# Altium PCB PCB1.pcbdoc
Units mm, origin at the board's own origin, x right, y up, seen from the top; angles counter-clockwise.
Board outline 213.29 x 130.36 mm, 2 copper layers (Top Layer, Bottom Layer), stack 1.58 mm thick; 81 components, 104 nets, 410 pads, 0 vias.
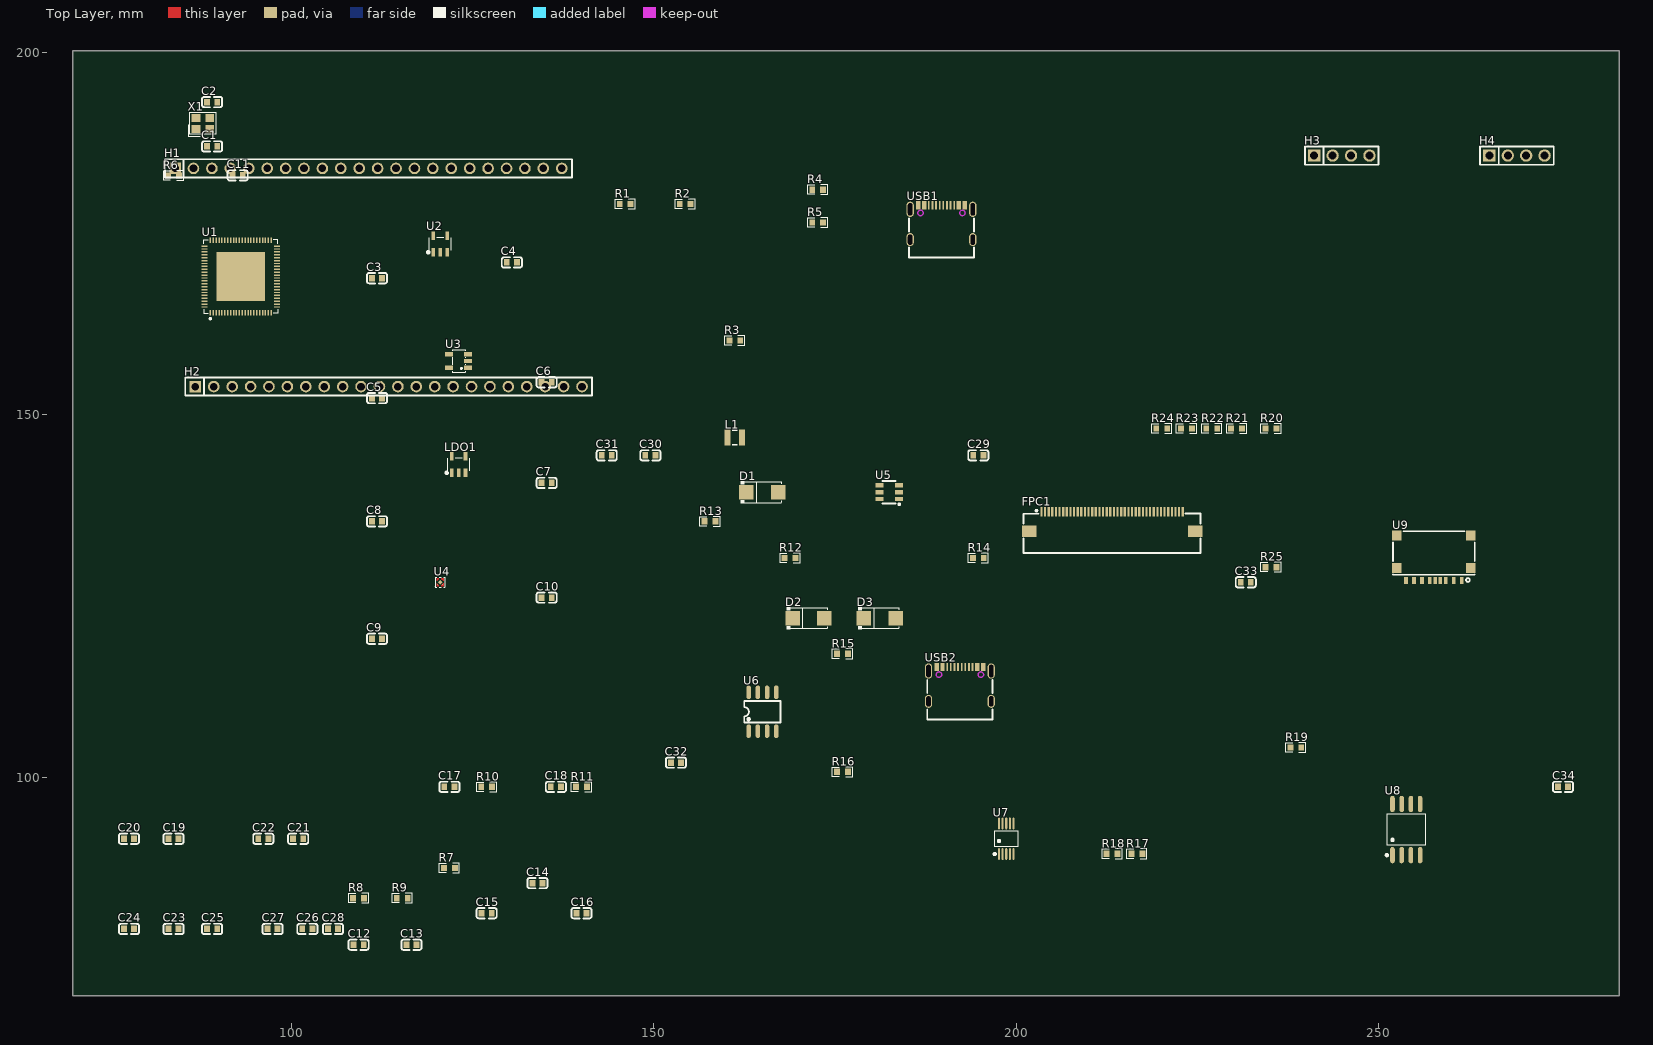
[diagram p0: Top Layer view]
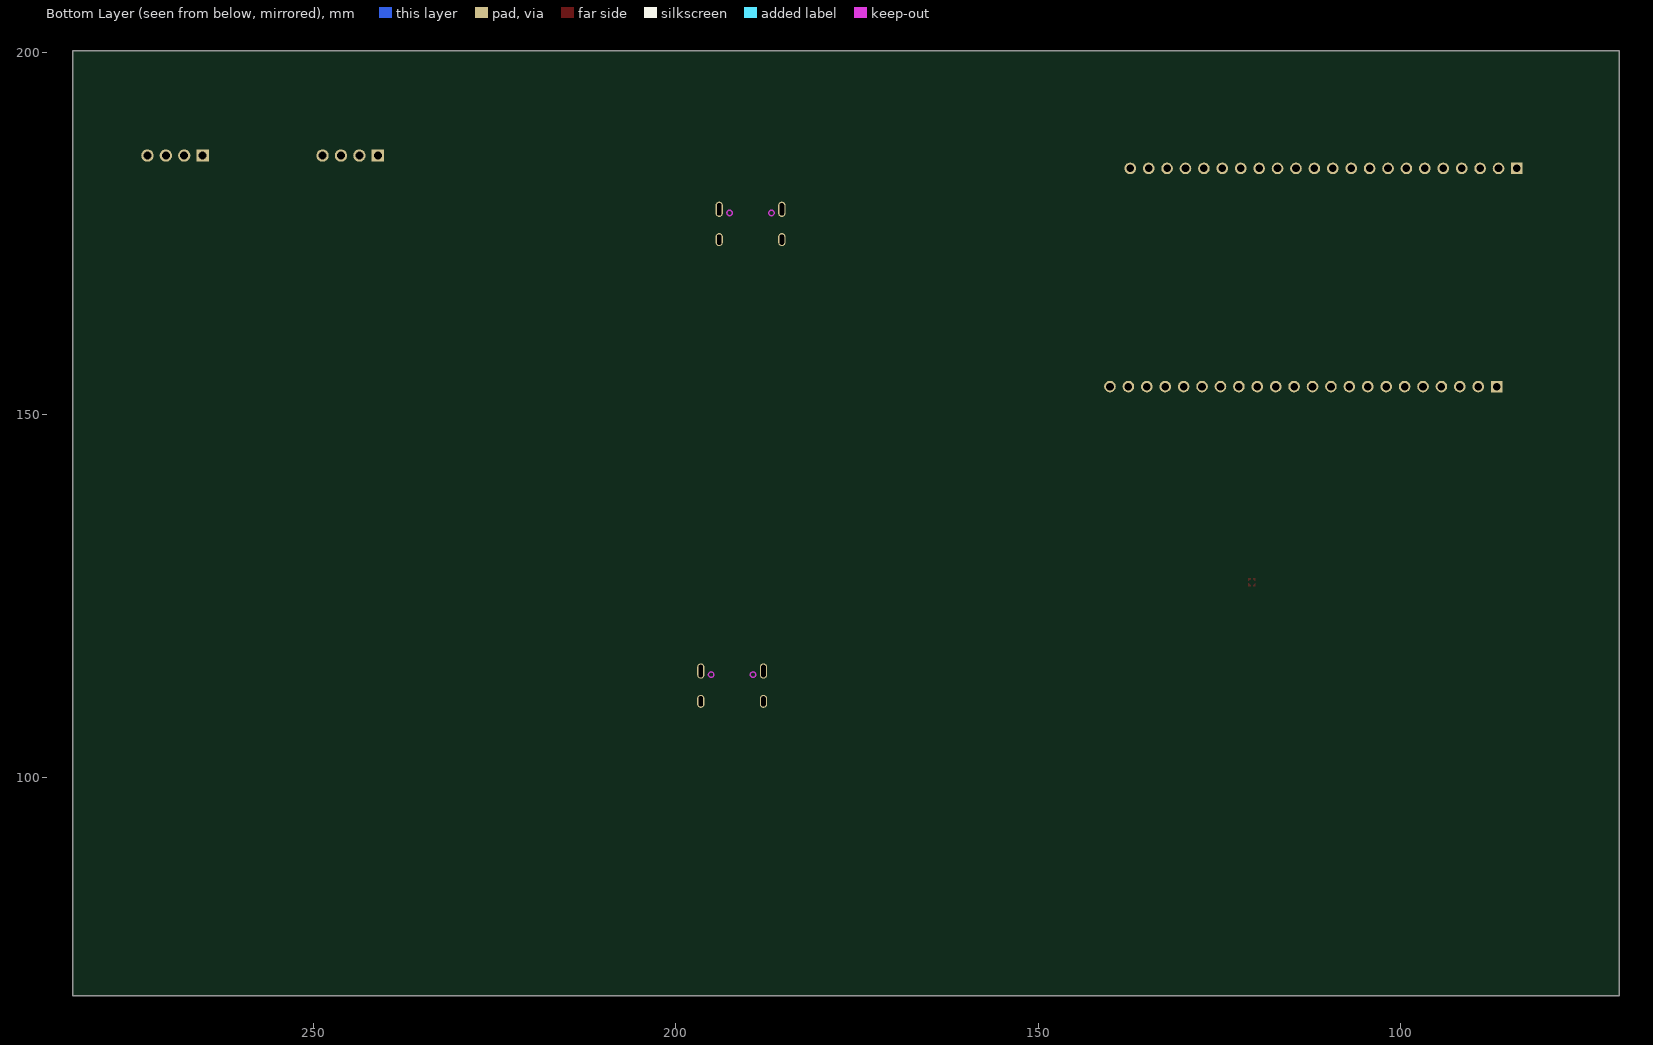
[diagram p1: Bottom Layer view, seen from below]

## Layer stack, top to bottom
Top Solder Mask Layer: solder mask 0.01, Dk 3.3
Top Layer: signal copper 0.035
Dielectric1: surface 1.51, FR4, Dk 4.5
Bottom Layer: signal copper 0.035
Bottom Solder Mask Layer: solder mask 0.01, Dk 3.3

## Board outline
283.139,69.85 69.85,69.85 69.85,200.206 283.139,200.206

## Design rules (kind name [scope] priority, off if disabled: settings)
BoardOutlineClearance copperThickness1oz [All] p0: genericclearance=0.254 ignorepadtopadclearanceinfootprint=FALSE except(0: Arc-SplitContinuation Track-SplitContinuation SMDPad-SplitContinuation THPad-SplitContinuation Via-SplitContinuation Fill-SplitContinuation Poly-SplitContinuation Region-SplitContinuation Text-SplitContinuation)
BoardOutlineClearance copperThickness2oz [All] p0: genericclearance=0.254 ignorepadtopadclearanceinfootprint=FALSE except(0: Arc-SplitContinuation Track-SplitContinuation SMDPad-SplitContinuation THPad-SplitContinuation Via-SplitContinuation Fill-SplitContinuation Poly-SplitContinuation Region-SplitContinuation Text-SplitContinuation)
BoardOutlineClearance otherClearance [All] p0: genericclearance=0.254 ignorepadtopadclearanceinfootprint=FALSE except(0: Arc-SplitContinuation Track-SplitContinuation SMDPad-SplitContinuation THPad-SplitContinuation Via-SplitContinuation Fill-SplitContinuation Poly-SplitContinuation Region-SplitContinuation Text-SplitContinuation)
Clearance copperThickness1oz [All] p1: gap=0.178 ignorepadtopadclearanceinfootprint=FALSE
Clearance copperThickness2oz [All] p1: gap=0.178 ignorepadtopadclearanceinfootprint=FALSE
Clearance otherClearance [All] p1: gap=0.178 ignorepadtopadclearanceinfootprint=FALSE
DiffPairsRouting differentialPair [All] p1: maxuncoupledlength=10 minlimit=6 maxlimit=Infinity mostfreqgap=6 toplayer_minwidth=5 toplayer_prefwidth=10 toplayer_maxwidth=100 bottomlayer_minwidth=5 bottomlayer_prefwidth=10 bottomlayer_maxwidth=100
PasteMaskExpansion pasteMaskExpansion [All] p1: expansion=0
PlaneConnect innerPlane [All] p1: planeconnectstyle=Relief reliefexpansion=0.508 reliefentries=4 reliefconductorwidth=0.254 reliefairgap=0.254
PolygonConnect copperRegion [All] p1: connectstyle=Relief reliefentries=4 reliefconductorwidth=10 polygonreliefangle="90 Angle" airgapwidth=10
RoutingVias viaSize [All] p1: viastyle="Through Hole" holewidth=12.0078 minholewidth=11.811 maxholewidth=248.0314 width=12.0078 minwidth=11.811 maxwidth=248.0314
SolderMaskExpansion solderMaskExpansion [All] p1: useseparateexpansions=TRUE expansion=2 expansionbottom=2
Width copperThickness1oz [All] p1: maxlimit=100 minlimit=5 preferedwidth=10
Width copperThickness2oz [All] p1: maxlimit=100 minlimit=8 preferedwidth=10

## Components (designator, comment, footprint, x,y, rotation, side; value= is the part's Value field where it differs from the comment)
C1 "" C0603 89.054,187.033 r0 top
C2 "" C0603 89.054,193.146 r0 top
C3 "" C0603 111.803,168.849 r0 top
C4 "" C0603 130.405,171.024 r0 top
C5 "" C0603 111.803,152.32 r0 top
C6 "" C0603 135.209,154.494 r0 top
C7 "" C0603 135.209,140.603 r0 top
C8 "" C0603 111.803,135.309 r0 top
C9 "" C0603 111.803,119.115 r0 top
C10 "" C0603 135.209,124.799 r0 top
C11 "" C0603 92.587,183.029 r0 top
C12 "" C0603 109.263,76.91 r0 top
C13 "" C0603 116.551,76.91 r0 top
C14 "" C0603 133.939,85.406 r0 top
C15 "" C0603 126.927,81.258 r0 top
C16 "" C0603 140.013,81.258 r0 top
C17 "" C0603 121.79,98.689 r0 top
C18 "" C0603 136.479,98.689 r0 top
C19 "" C0603 83.739,91.527 r0 top
C20 "" C0603 77.59,91.527 r0 top
C21 "" C0603 100.925,91.527 r0 top
C22 "" C0603 96.121,91.527 r0 top
C23 "" C0603 83.739,79.084 r0 top
C24 "" C0603 77.59,79.084 r0 top
C25 "" C0603 89.054,79.084 r0 top
C26 "" C0603 102.195,79.084 r0 top
C27 "" C0603 97.391,79.084 r0 top
C28 "" C0603 105.729,79.084 r0 top
C29 "" C0603 194.744,144.413 r0 top
C30 "" C0603 149.509,144.413 r0 top
C31 "" C0603 143.491,144.413 r0 top
C32 "" C0603 153.043,102.033 r0 top
C33 "" C0603 231.639,126.911 r0 top
C34 "" C0603 275.399,98.689 r0 top
D1 "" SMA_L4.3-W2.6-LS5.2-RD 164.968,139.333 r0 top
D2 "" SMA_L4.3-W2.6-LS5.2-RD 171.318,121.957 r0 top
D3 "" SMA_L4.3-W2.6-LS5.2-RD 181.172,121.957 r0 top
FPC1 "" FPC-SMD_AFC01-S40FCA-00 213.2,135.309 r0 top
H1 "" HDR-TH_22P-P2.54-V-M 110.617,183.997 r0 top
H2 "" HDR-TH_22P-P2.54-V-M 113.411,153.898 r0 top
H3 "" HDR-TH_4P-P2.54-V-M 244.89,185.763 r0 top
H4 "" HDR-TH_4P-P2.54-V-M 269.049,185.763 r0 top
L1 "" IND-SMD_L2.5-W2.0_MHCHL2520 161.158,146.85 r0 top
LDO1 "" SOT-23-5_L3.0-W1.7-P0.95-LS2.8-BL 123.06,143.143 r0 top
R1 "" R0603 146.031,179.082 r0 top
R2 "" R0603 154.313,179.082 r0 top
R3 "" R0603 161.158,160.268 r0 top
R4 "" R0603 172.588,181.055 r0 top
R5 "" R0603 172.588,176.542 r0 top
R6 "" R0603 83.739,183.029 r0 top
R7 "" R0603 121.79,87.48 r0 top
R8 "" R0603 109.263,83.332 r0 top
R9 "" R0603 115.281,83.332 r0 top
R10 "" R0603 126.927,98.689 r0 top
R11 "" R0603 140.013,98.689 r0 top
R12 "" R0603 168.778,130.255 r0 top
R13 "" R0603 157.736,135.309 r0 top
R14 "" R0603 194.744,130.255 r0 top
R15 "" R0603 176.011,117.041 r0 top
R16 "" R0603 176.011,100.763 r0 top
R17 "" R0603 216.623,89.454 r0 top
R18 "" R0603 213.2,89.454 r0 top
R19 "" R0603 238.54,104.107 r0 top
R20 "" R0603 235.117,148.12 r0 top
R21 "" R0603 230.369,148.12 r0 top
R22 "" R0603 226.946,148.12 r0 top
R23 "" R0603 223.468,148.12 r0 top
R24 "" R0603 220.046,148.12 r0 top
R25 "" R0603 235.117,128.985 r0 top
U1 "" QFN-88_L10.0-W10.0-P0.40-BL-EP6.75 93.01,169.075 r0 top
U2 "" SOT-23-5_L3.0-W1.7-P0.95-LS2.8-BL 120.52,173.564 r0 top
U3 "" SOT-23-5_L3.0-W1.7-P0.95-LS2.8-BR 123.06,157.431 r0 top
U4 "" FBP4L_L1.0-W1.0-P0.65-BL-EP 120.52,126.911 r0 top
U5 "" SOT-23-6_L2.9-W1.6-P0.95-LS2.8-BR 182.442,139.333 r0 top
U6 "" SOP-8_L4.9-W3.9-P1.27-LS6.0-BL 164.968,109.044 r0 top
U7 "" MSOP-10_L3.0-W3.0-P0.50-LS5.0-BL 198.598,91.527 r0 top
U8 "" SOIC-8_L5.3-W5.3-P1.27-LS8.0-BL 253.78,92.797 r0 top
U9 "" TF-SMD_TF-123-ARP9H15 257.59,130.255 r0 top
USB1 "" USB-C-SMD_MC-107DMS 189.664,176.542 r0 top
USB2 "" USB-C-SMD_MC-107DMS 192.204,112.854 r0 top
X1 "" CRYSTAL-SMD_4P-L2.5-W2.0-BL 87.784,190.204 r0 top

## Footprints (in the part's own frame and the unit in brackets; to place one, negate y for a bottom-side part, rotate by r counter-clockwise, add the part's x,y. Pads: shape width x height; smd on the part's side, far side on the other; paste and mask are expansions set on the pad)
C0603 [mm]
  rect 0.8x0.9 smd: 1(-0.7,0) 2(0.7,0)
  silkscreen extent -1.39,-0.71 1.39,0.71
CRYSTAL-SMD_4P-L2.5-W2.0-BL [mm]
  rect 1.2x1.1 smd: 1(-0.95,-0.75) 2(0.95,-0.75) 3(0.95,0.75) 4(-0.95,0.75)
  silkscreen extent -2.01,-1.76 1.78,1.53
FBP4L_L1.0-W1.0-P0.65-BL-EP [mm]
  round 0.06 smd: 1(-0.325,-0.325) 2(0.325,-0.325) 3(0.325,0.325) 4(-0.325,0.325)
  rect 0.48x0.48 smd rot 45: 5(0,0)
  Top Layer region: -0.175,-0.525 -0.475,-0.525 -0.475,-0.125 -0.175,-0.425
  Top Layer region: 0.175,0.525 0.475,0.525 0.475,0.175 0.425,0.175 0.175,0.425
  Top Layer region: -0.475,0.175 -0.475,0.525 -0.175,0.525 -0.175,0.475 -0.175,0.425 -0.425,0.175
  Top Layer region: 0.475,-0.175 0.475,-0.525 0.175,-0.525 0.175,-0.425 0.425,-0.175
  silkscreen extent -0.83,-0.7 0.66,0.7
FPC-SMD_AFC01-S40FCA-00 [mm]
  rect 0.3x1.3 smd: 1(-9.75,1.34) 2(-9.25,1.338) 3(-8.75,1.34) 4(-8.25,1.34) 5(-7.75,1.34) 6(-7.25,1.34) 7(-6.75,1.34) 8(-6.25,1.34) 9(-5.75,1.34) 10(-5.25,1.34) 11(-4.75,1.34) 12(-4.25,1.34) 13(-3.75,1.34) 14(-3.25,1.34) 15(-2.75,1.34) 16(-2.25,1.34) 17(-1.75,1.34) 18(-1.25,1.34) 19(-0.75,1.34) 20(-0.25,1.34) 21(0.25,1.34) 22(0.75,1.34) 23(1.25,1.34) 24(1.75,1.34) 25(2.25,1.34) 26(2.75,1.34) 27(3.25,1.34) 28(3.75,1.34) 29(4.25,1.34) 30(4.75,1.34) 31(5.25,1.34) 32(5.75,1.34) 33(6.25,1.34) 34(6.75,1.34) 35(7.25,1.34) 36(7.75,1.34) 37(8.25,1.34) 38(8.75,1.34) 39(9.25,1.34) 40(9.75,1.34)
  rect 2x1.6 smd: 41(-11.45,-1.34) 42(11.45,-1.34)
  silkscreen extent -12.21,-4.36 12.21,1.61
HDR-TH_4P-P2.54-V-M [mm]
  rect 1.7x1.7 hole 1.1: 1(-3.81,0)
  round 1.7 hole 1.1: 2(-1.27,0) 3(1.27,0) 4(3.81,0)
  silkscreen extent -5.08,-1.27 5.08,1.27
HDR-TH_22P-P2.54-V-M [mm]
  rect 1.6x1.6 hole 1.05: 1(-26.67,0)
  round 1.6 hole 1.05: 2(-24.13,0) 3(-21.59,0) 4(-19.05,0) 5(-16.51,0) 6(-13.97,0) 7(-11.43,0) 8(-8.89,0) 9(-6.35,0) 10(-3.81,0) 11(-1.27,0) 12(1.27,0) 13(3.81,0) 14(6.35,0) 15(8.89,0) 16(11.43,0) 17(13.97,0) 18(16.51,0) 19(19.05,0) 20(21.59,0) 21(24.13,0) 22(26.67,0)
  silkscreen extent -28.06,-1.25 28.06,1.25
IND-SMD_L2.5-W2.0_MHCHL2520 [mm]
  rect 0.8x2.2 smd: 1(-1,0) 2(1,0)
  silkscreen extent -0.37,-1 0.37,1
MSOP-10_L3.0-W3.0-P0.50-LS5.0-BL [mm]
  oval 0.28x1.62 smd: 1(-1,-2.11) 2(-0.5,-2.11) 3(0,-2.11) 4(0.5,-2.11) 5(1,-2.11) 6(1,2.11) 7(0.5,2.11) 8(0,2.11) 9(-0.5,2.11) 10(-1,2.11)
  silkscreen extent -1.74,-2.26 1.58,1.07
QFN-88_L10.0-W10.0-P0.40-BL-EP6.75 [mm]
  rect 0.2x0.8 smd: 1(-4.2,-5) 2(-3.8,-5) 3(-3.4,-5) 4(-3,-5) 5(-2.6,-5) 6(-2.2,-5) 7(-1.8,-5) 8(-1.4,-5) 9(-1,-5) 10(-0.6,-5) 11(-0.2,-5) 12(0.2,-5) 13(0.6,-5) 14(1,-5) 15(1.4,-5) 16(1.8,-5) 17(2.2,-5) 18(2.6,-5) 19(3,-5) 20(3.4,-5) 21(3.8,-5) 22(4.2,-5) 45(4.2,5) 46(3.8,5) 47(3.4,5) 48(3,5) 49(2.6,5) 50(2.2,5) 51(1.8,5) 52(1.4,5) 53(1,5) 54(0.6,5) 55(0.2,5) 56(-0.2,5) 57(-0.6,5) 58(-1,5) 59(-1.4,5) 60(-1.8,5) 61(-2.2,5) 62(-2.6,5) 63(-3,5) 64(-3.4,5) 65(-3.8,5) 66(-4.2,5)
  rect 0.8x0.2 smd: 23(5,-4.2) 24(5,-3.8) 25(5,-3.4) 26(5,-3) 27(5,-2.6) 28(5,-2.2) 29(5,-1.8) 30(5,-1.4) 31(5,-1) 32(5,-0.6) 33(5,-0.2) 34(5,0.2) 35(5,0.6) 36(5,1) 37(5,1.4) 38(5,1.8) 39(5,2.2) 40(5,2.6) 41(5,3) 42(5,3.4) 43(5,3.8) 44(5,4.2) 67(-5,4.2) 68(-5,3.8) 69(-5,3.4) 70(-5,3) 71(-5,2.6) 72(-5,2.2) 73(-5,1.8) 74(-5,1.4) 75(-5,1) 76(-5,0.6) 77(-5,0.2) 78(-5,-0.2) 79(-5,-0.6) 80(-5,-1) 81(-5,-1.4) 82(-5,-1.8) 83(-5,-2.2) 84(-5,-2.6) 85(-5,-3) 86(-5,-3.4) 87(-5,-3.8) 88(-5,-4.2)
  rect 6.75x6.75 smd: 89(0,0)
  silkscreen extent -5.08,-5.93 5.08,5.08
R0603 [mm]
  rect 0.806x0.864 smd: 1(-0.753,0) 2(0.753,0)
  silkscreen extent -1.39,-0.66 1.39,0.66
SMA_L4.3-W2.6-LS5.2-RD [mm]
  rect 2x2 smd: 1(-2.2,0) 2(2.2,0)
  silkscreen extent -2.98,-1.5 2.6,1.5
SOIC-8_L5.3-W5.3-P1.27-LS8.0-BL [mm]
  oval 0.63x2.25 smd: 1(-1.905,-3.53) 2(-0.635,-3.53) 3(0.635,-3.53) 4(1.905,-3.53) 5(1.905,3.53) 6(0.635,3.53) 7(-0.635,3.53) 8(-1.905,3.53)
  silkscreen extent -2.82,-3.68 2.64,2.18
SOP-8_L4.9-W3.9-P1.27-LS6.0-BL [mm]
  oval 0.63x1.865 smd: 1(-1.905,-2.682) 2(-0.635,-2.682) 3(0.635,-2.682) 4(1.905,-2.682) 5(1.905,2.682) 6(0.635,2.682) 7(-0.635,2.682) 8(-1.905,2.682)
  silkscreen extent -2.5,-1.5 2.5,1.48
SOT-23-5_L3.0-W1.7-P0.95-LS2.8-BL [mm]
  rect 0.49x1.157 smd: 1(-0.95,-1.154) 2(0,-1.154) 3(0.95,-1.154)
  rect 0.49x1.175 smd: 4(0.95,1.154) 5(-0.95,1.154)
  silkscreen extent -1.8,-1.29 1.53,0.85
SOT-23-5_L3.0-W1.7-P0.95-LS2.8-BR [mm]
  rect 1.1x0.6 smd: 1(1.3,-0.95) 2(1.3,0) 3(1.3,0.95) 4(-1.3,0.95) 5(-1.3,-0.95)
  silkscreen extent -0.9,-1.55 0.9,1.55
SOT-23-6_L2.9-W1.6-P0.95-LS2.8-BR [mm]
  rect 1.1x0.6 smd: 1(1.35,-0.95) 2(1.35,0) 3(1.35,0.95) 4(-1.35,0.95) 5(-1.35,0) 6(-1.35,-0.95)
  silkscreen extent -0.9,-1.78 1.52,1.55
TF-SMD_TF-123-ARP9H15 [mm]
  rect 0.5x1 smd: 1(3.85,-3.092) 2(2.75,-3.092) 3(1.65,-3.092) 4(0.9,-3.092) 5(-0.55,-3.092) 6(-1.65,-3.092) 7(-2.75,-3.092) 8(-3.85,-3.092) 9(0.2,-3.092)
  rect 1.3x1.4 smd: 10(-5.1,-1.357) 11(-5.1,3.092) 12(5.1,3.092) 13(5.1,-1.357)
  silkscreen extent -5.63,-3.29 5.62,3.69
USB-C-SMD_MC-107DMS [mm]
  oval 1x2.1 hole 0.6 slot 1.7 at 90 deg copper offset 0,0: 13(-4.32,1.807) 16(4.32,1.807)
  oval 1x1.8 hole 0.6 slot 1.4 at 90 deg: 14(-4.32,-2.372) 15(4.32,-2.372)
  rect 0.6x1.15 smd: A1/B12(-3.2,2.372) A4/B9(-2.4,2.372) B1/A12(3.2,2.372) B4/A9(2.4,2.372)
  rect 0.25x1.15 smd: A5(-1.25,2.372) A6(-0.25,2.372) A7(0.25,2.372) A8(1.25,2.372) B5(1.75,2.372) B6(0.75,2.372) B7(-0.75,2.372) B8(-1.75,2.372)
  Board Outline Layer circle w0.003: c-2.89,1.308 r0.375
  Board Outline Layer circle w0.003: c2.89,1.308 r0.375
  Board Outline Layer region: -2.515,1.308 -2.552,1.145 -2.656,1.015 -2.806,0.942 -2.973,0.942 -3.124,1.015 -3.228,1.145 -3.265,1.308 -3.265,1.308 -3.228,1.471 -3.124,1.601 -2.973,1.674 -2.806,1.674 -2.656,1.601 -2.552,1.471 -2.515,1.308
  Board Outline Layer region: -2.515,1.308 -2.552,1.145 -2.656,1.015 -2.806,0.942 -2.973,0.942 -3.124,1.015 -3.228,1.145 -3.265,1.308 -3.265,1.308 -3.228,1.471 -3.124,1.601 -2.973,1.674 -2.806,1.674 -2.656,1.601 -2.552,1.471 -2.515,1.308
  Board Outline Layer region: 3.265,1.308 3.228,1.145 3.124,1.015 2.973,0.942 2.806,0.942 2.656,1.015 2.552,1.145 2.515,1.308 2.515,1.308 2.552,1.471 2.656,1.601 2.806,1.674 2.973,1.674 3.124,1.601 3.228,1.471 3.265,1.308
  Board Outline Layer region: 3.265,1.308 3.228,1.145 3.124,1.015 2.973,0.942 2.806,0.942 2.656,1.015 2.552,1.145 2.515,1.308 2.515,1.308 2.552,1.471 2.656,1.601 2.806,1.674 2.973,1.674 3.124,1.601 3.228,1.471 3.265,1.308
  silkscreen extent -4.5,-4.86 4.5,0.55

## Nets (pads, with @x,y where several pads share a name; then routed paths per layer and width w, separated by ;. In a path a pad name is that pad's centre, name@x,y a point inside that pad or via, vN(x,y) a via of type N, cw(c..) or ccw(c..) an arc to the next point about the centre after c; other vN are vias at no path point)
$1N240: C12.2 C13.1
$1N261: R12.2 R13.2 U5.4
$1N268: U5.1
$1N269: D1.1 U5.5
$1N275: D2.1 D3.1
$1N276: D3.2 USB2.A4/B9
$1N280: R16.2 USB2.B5
$1N281: R15.2 USB2.A5
$1N282: U6.1 USB2.A6 USB2.B6
$1N283: U6.2 USB2.A7 USB2.B7
$1N377: R25.2 U9.5
+1.2V: C4.2 C23.2 C24.2 C25.2 U1.22 U1.35 U1.71 U2.5
+2.5V: C6.2 C12.1 C19.2 C20.2 R8.1 U1.30 U1.31 U1.32 U1.34 U1.36 U3.5
+2.8V: C10.2 H2.16 U1.80 U4.1
+3.3V: C7.2 C26.2 C27.2 C28.2 C32.2 C33.1 C34.2 FPC1.4 FPC1.31 H2.11 LDO1.5 R3.2 R6.1 R7.1 R12.1 R17.1 R18.1 R19.2 R20.2 R21.2 R22.2 R23.2 R24.2 U1.4 U1.5 U1.20 U1.50 U1.67 U6.5 U6.8 U7.1 U8.3 U8.7 U8.8 U9.4
+5V: C3.2 C5.2 C8.2 C9.2 C29.2 D2.2 H2.15 L1.2 LDO1.1 LDO1.3 U2.1 U2.3 U3.1 U3.3 U4.3 U4.4 U5.6 USB1.A4/B9 USB1.B4/A9
CC1: R1.2 USB1.A5
CC2: R2.2 USB1.B5
D1+: R5.2 USB1.A6 USB1.B6
D1-: R4.2 USB1.A7 USB1.B7
EH: USB1.13 USB1.14 USB1.15 USB1.16
FMINL: U1.84
FMINR: U1.85
GND: C1.2 C2.1 C3.1 C4.1 C5.1 C6.1 C7.1 C8.1 C9.1 C10.1 C11.2 C13.2 C15.1 C16.1 C17.1 C18.1 C19.1 C20.1 C21.1 C22.1 C23.1 C24.1 C25.1 C26.1 C27.1 C28.1 C29.1 C30.2 C31.2 C32.1 C33.2 C34.1 FPC1.3 FPC1.5 FPC1.6 FPC1.13 FPC1.14 FPC1.21 FPC1.22 FPC1.29 FPC1.36 FPC1.41 FPC1.42 H2.13 LDO1.2 R1.1 R2.1 R9.2 R10.1 R11.1 R14.1 R15.1 R16.1 U1.74 U1.82 U1.89 U2.2 U3.2 U4.2 U5.2 U6.3 U7.6 U7.8 U8.4 U9.6 U9.10 U9.11 U9.12 U9.13 USB1.A1/B12 USB1.B1/A12 USB2.A1/B12 USB2.B1/A12 X1.2 X1.4
HIPCOMFB: H2.1 U1.2
HOSCI: C2.2 U1.51 X1.3
HOSCO: C1.1 U1.52 X1.1
HPCOM: H2.2 U1.3
HPL: H2.4 U1.1
HPR: H2.6 U1.88
LCD_CLK: FPC1.30 U1.26
LCD_D2: FPC1.23 U1.6
LCD_D3: FPC1.24 U1.7
LCD_D4: FPC1.25 U1.8
LCD_D5: FPC1.26 U1.9
LCD_D6: FPC1.27 U1.10
LCD_D7: FPC1.28 U1.11
LCD_D10: FPC1.15 U1.12
LCD_D11: FPC1.16 U1.13
LCD_D12: FPC1.17 U1.14
LCD_D13: FPC1.18 U1.15
LCD_D14: FPC1.19 U1.16
LCD_D15: FPC1.20 U1.17
LCD_D18: FPC1.7 U1.18
LCD_D19: FPC1.8 U1.19
LCD_D20: FPC1.9 U1.21
LCD_D21: FPC1.10 U1.23
LCD_D22: FPC1.11 U1.24
LCD_D23: FPC1.12 U1.25
LCD_DE: FPC1.34 H1.2 U1.27
LCD_HSYNC: FPC1.32 U1.28 U7.7
LCD_VSYNC: FPC1.33 H1.1 U1.29
LINL: H2.10 U1.86
LRADC0: H2.14 U1.79
MICIN: H2.8 U1.87
PA0: H2.9 U1.66
PA1: H2.7 U1.65
PA2: H2.5 U1.64
PA3: H2.3 U1.63
PC0: H1.16 U1.59 U8.6
PC1: H1.18 R19.1 U1.60 U8.1
PC2: H1.20 U1.61 U8.2
PC3: H1.22 U1.62 U8.5
PE0: H2.17 U1.49 U6.6
PE1: H2.19 U1.48 U6.7
PE2: H2.21 R3.1 U1.47
PE3: H1.21 U1.46
PE4: H1.19 U1.45
PE5: H1.17 U1.44
PE6: H1.15 R13.1 U1.43
PE7: H1.13 U1.42
PE8: H1.11 U1.41
PE9: H1.9 U1.40
PE10: H1.7 U1.39
PE11: H1.5 R18.2 U1.38 U7.10
PE12: H1.3 R17.2 U1.37 U7.9
PF0: H1.4 R24.1 U1.58 U9.8
PF1: H1.6 R23.1 U1.57 U9.7
PF2: H1.8 R25.1 U1.56
PF3: H1.10 R22.1 U1.55 U9.3
PF4: H1.12 R21.1 U1.54 U9.2
PF5: H1.14 R20.1 U1.53 U9.1
RESET: C11.1 H2.12 R6.2 U1.70
SBU1: USB1.A8
SBU2: USB1.B8
SVREF: R8.2 R9.1 U1.33
TV_VCC: C21.2 C22.2 R7.2 U1.73
TV_VRN: C14.2 C16.2 U1.75
TV_VRP: C14.1 C15.2 U1.76
TVIN0: H4.3 U1.78
TVIN1: H4.4 U1.77
TVOUT: H2.18 U1.72
USB-DM: U1.68
USB-DP: U1.69
USB_DM: H2.22 R4.1
USB_DP: H2.20 R5.1
VLED+: C30.1 C31.1 D1.2 FPC1.1 H4.1 L1.1
VLED-: FPC1.2 H4.2 R14.2 U5.3
VRA1: C18.2 R11.2 U1.81
VRA2: C17.2 R10.2 U1.83
XN: FPC1.39 H3.3 U7.4
XP: FPC1.37 H3.1 U7.2
YN: FPC1.40 H3.4 U7.5
YP: FPC1.38 H3.2 U7.3
pads on no net: FPC1.35 LDO1.4 U2.4 U3.4 U4.5 U6.4 U9.9 USB2.13 USB2.14 USB2.15 USB2.16 USB2.A8 USB2.B4/A9 USB2.B8